# Altium PCB node.PcbDoc
Units mil, origin at the board's own origin, x right, y up, seen from the top; angles counter-clockwise.
Board outline 1500 x 1050 mil, 2 copper layers (Top Layer, Bottom Layer); 20 components, 25 nets, 93 pads, 0 vias.
Unrouted connection lines stored in the file: 51.
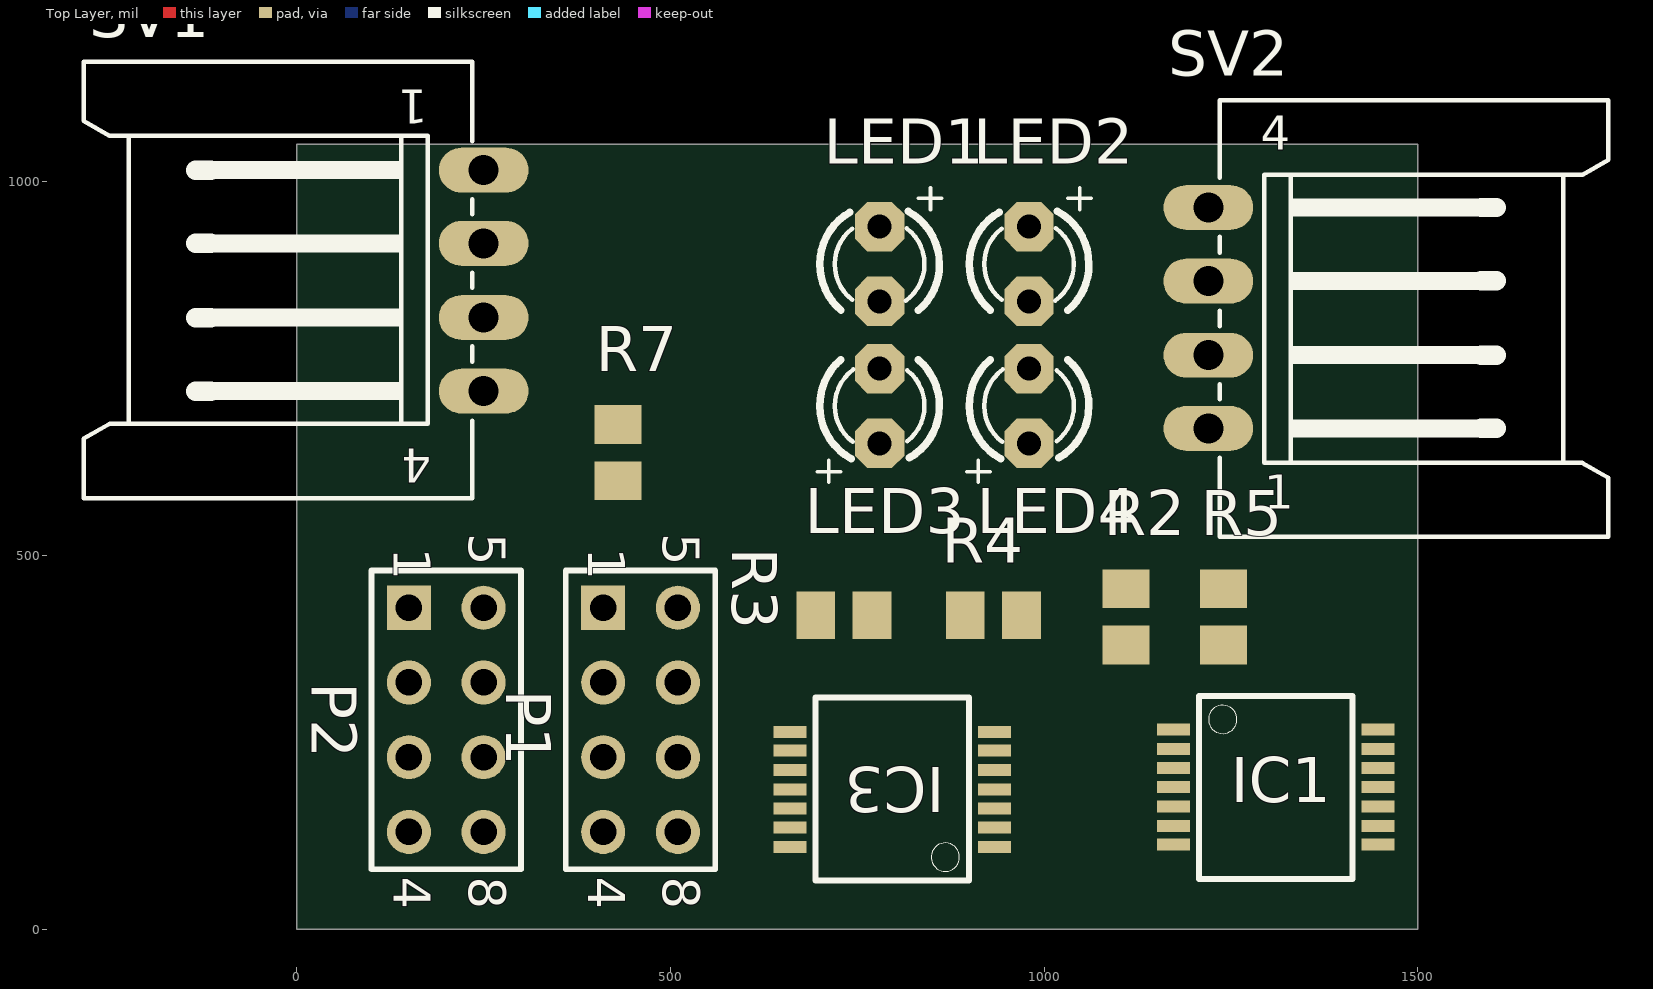
[diagram p0: Top Layer view]
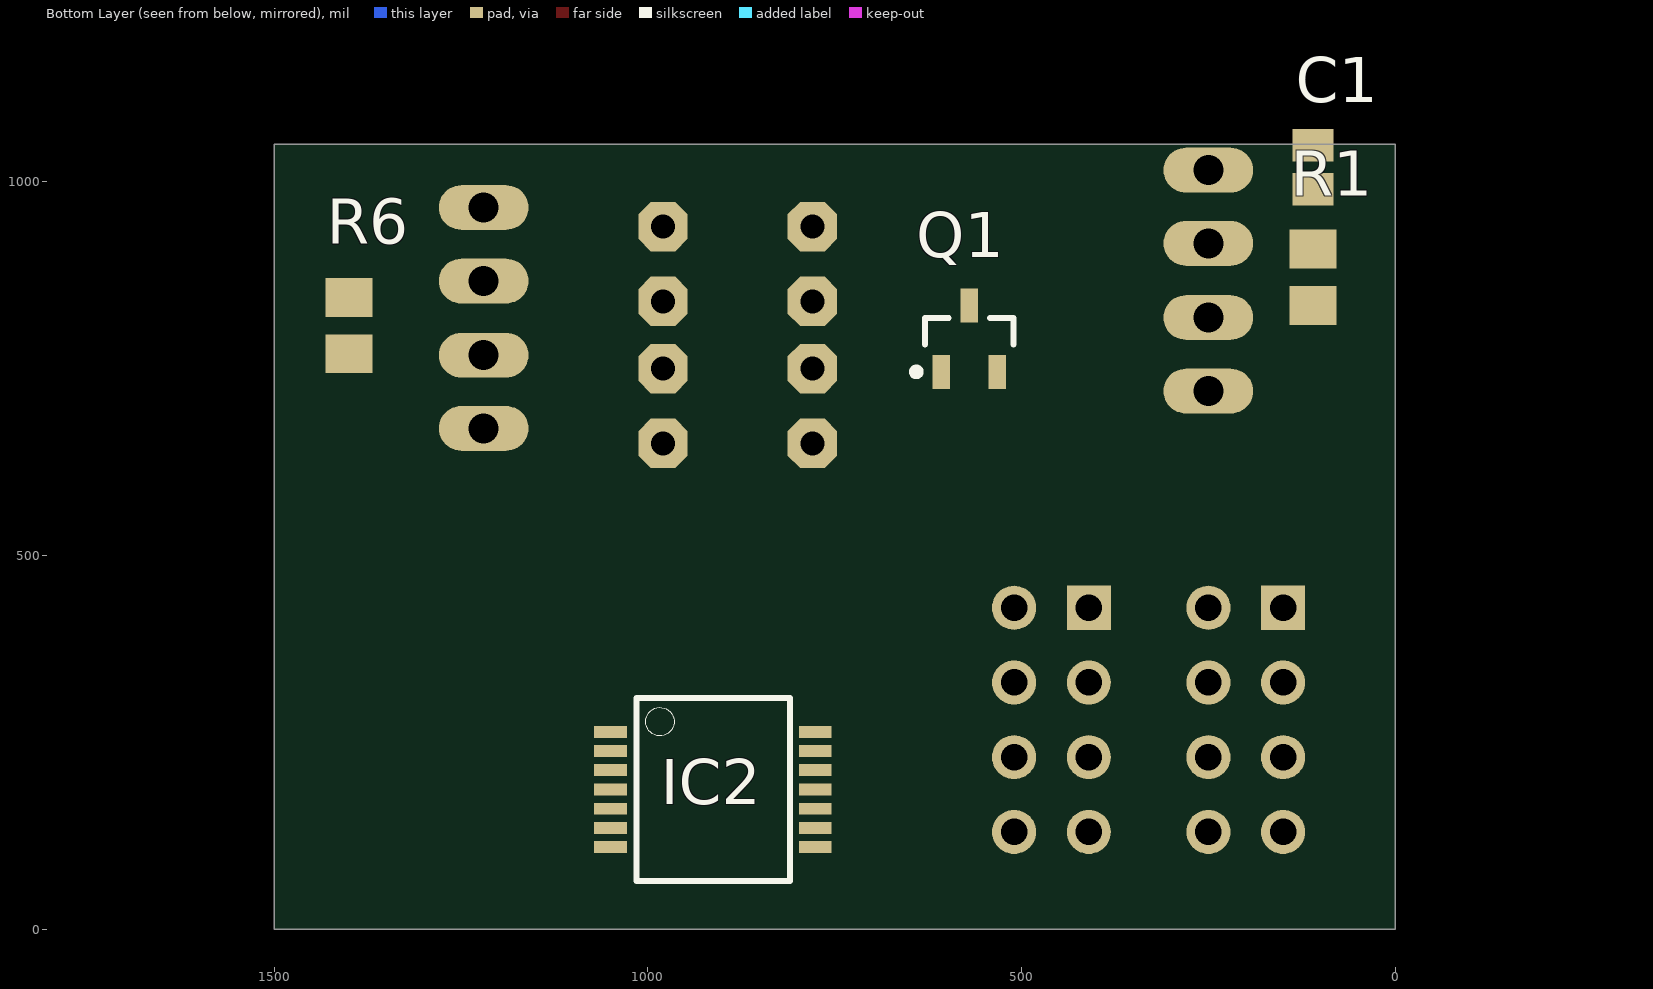
[diagram p1: Bottom Layer view, seen from below]

## Layer stack, top to bottom
Top Solder: solder mask 0.4, Solder Resist, Dk 3.5
Top Layer: signal copper 1.4
Dielectric 1: dielectric 12.6, FR-4, Dk 4.8
Bottom Layer: signal copper 1.4
Bottom Solder: solder mask 0.4, Solder Resist, Dk 3.5

## Board outline
0,0 1500,0 1500,1050 0,1050

## Design rules (kind name [scope] priority, off if disabled: settings)
Clearance [All] p1: gap=10
PolygonConnect [All] p1: connectstyle=Relief reliefconductorwidth=10 reliefentries=4 polygonreliefangle="90 Angle" airgapwidth=10
RoutingVias [All] p1: holewidth=28 width=50 viastyle="Through Hole" minholewidth=28 minwidth=50 maxholewidth=28 maxwidth=50
SolderMaskExpansion [All] p1: expansion=4
UnpouredPolygon [All] p1: allowunpoured=FALSE
Width power [InNetClass('power')] p1: maxlimit=50 minlimit=27 preferedwidth=32
Width signal [InNetClass('signal')] p2: maxlimit=25 minlimit=10 preferedwidth=18
29 further rules are at their usual default settings.

## Classes and differential pairs
net class signal: G1A G1B G2A G2B G3A G3B G4A G4B GA GB GND NetIC1_2 NetIC1_4 NetIC1_5 NetIC1_6 NetIC1_8 NetIC1_9 NetIC1_11 NetIC3_3 NetIC3_6 TO_LED
net class power: GA GB GND NetLED1_A NetLED1_K NetQ1_2 TO_LED VCC

## Components (designator, comment, footprint, x,y, rotation, side; value= is the part's Value field where it differs from the comment)
C1 "Cap Pol3" C0805 110,1019.53 r270 bottom
IC1 "Inverter" ssop14 1310,190 r270 top
IC2 "NAND" SSOP14 913.19,187 r270 bottom
IC3 "OR" ssop14 797,186.77 r90 top
LED1 "3mmLED" LED3MM 780,890 r270 top
LED2 "3mmLED" LED3MM 980,890 r270 top
LED3 "3mmLED" LED3MM 780,700 r90 top
LED4 "3mmLED" LED3MM 980,700 r90 top
P1 "Header 4X2A" HDR2X4_CEN 410,430 r270 top
P2 "Header 4X2A" HDR2X4_CEN 150,430 r270 top
Q1 "PNP" SOT-23B_N 570,790 r90 bottom
R1 "4.7k" M0805 110,872.6 r270 bottom
R2 "4.7k" M0805 1110,418 r270 top
R3 "4.7k" M0805 732.6,420 r180 top
R4 "4.7k" M0805 932,420 r0 top
R5 "4.7k" M0805 1240,418 r270 top
R6 "4.7k" M0805 1400,808 r270 bottom
R7 "4.7k" M0805 430,638 r270 top
SV1 "IN_HD" L04P 3.94,867.64 r90 top
SV2 "OUT_HD" L04P 1466.06,818 r270 top

## Footprints (in the part's own frame and the unit in brackets; to place one, negate y for a bottom-side part, rotate by r counter-clockwise, add the part's x,y. Pads: shape width x height; smd on the part's side, far side on the other; paste and mask are expansions set on the pad)
C0805 [mm] "Chip Capacitor, Body 2.0x1.3mm, IPC High Density"
  rect 1.1x1.4 smd: 1(-0.75,0) 2(0.75,0)
  body extent -1.1,-0.72 1.1,0.72, height 1.4
HDR2X4_CEN [mm] "Connector; Header; 4x2 Position"
  rect 1.5x1.5 hole 0.9: 1(0,0)
  round 1.5 hole 0.9: 2(2.54,0) 3(5.08,0) 4(7.62,0) 5(0,2.54) 6(2.54,2.54) 7(5.08,2.54) 8(7.62,2.54)
  silkscreen extent -1.27,-1.27 8.89,3.81
L04P [mil]
  oval 60x120 hole 40: 1(148,-246.06) 2(50,-246.06) 3(-49.21,-246.06) 4(-147.64,-246.06)
  silkscreen extent -291,-231 293,289
LED3MM [mil]
  oct 66x66 hole 32: A(-50,0) K(50,0)
  silkscreen extent -102,-80 62,83
M0805 [mil]
  rect 52x63 smd: 1(-37.4,0) 2(38,0)
SOT-23B_N [mm] "SOT23, 3-Leads, Body 2.9x1.3mm, Pitch 0.95mm, Lead Span 2.4mm, IPC Medium Density"
  rect 1.15x0.6 smd: 1(-1.125,0.95) 2(-1.125,-0.95) 3(1.125,0)
  silkscreen extent -1.25,-1.5 0.7,1.93, body extent -0.7,-1.5 0.7,1.5, height 1.14
ssop14 [mil]
  rect 16x44 smd: 1(-76.77,-136.81) 2(-51.18,-136.81) 3(-25.59,-136.81) 4(0,-136.81) 5(26,-136.81) 6(52,-136.81) 7(77,-136.81) 8(77,137) 9(52,137) 10(26,137) 11(0,137) 12(-25.59,137) 13(-51.18,137) 14(-76.77,137)
  silkscreen extent -122,-102 123,103
SSOP14 [mil]
  rect 16x44 smd: 1(-76.77,-136.81) 2(-51.18,-136.81) 3(-25.59,-136.81) 4(0,-136.81) 5(26,-136.81) 6(52,-136.81) 7(77,-136.81) 8(77,137) 9(52,137) 10(26,137) 11(0,137) 12(-25.59,137) 13(-51.18,137) 14(-76.77,137)
  silkscreen extent -122,-102 123,103

## Part data
C1: "Polarized Capacitor (Surface Mount)"
IC1: library part 74*04DB
IC2: library part 74*00DB
IC3: library part 74*32DB
LED1 LED2 LED3 LED4: library part LED3MM
P1 P2: "Header, 4-Pin, Dual row"
Q1: "PNP Bipolar Transistor"
R1 R3 R4 R5 R6 R7: library part R-US_M0805, "R-M0805"
R2: library part R-US_M0805
SV1 SV2: library part L04P

## Nets (pads, with @x,y where several pads share a name; then routed paths per layer and width w, separated by ;. In a path a pad name is that pad's centre, name@x,y a point inside that pad or via, vN(x,y) a via of type N, cw(c..) or ccw(c..) an arc to the next point about the centre after c; other vN are vias at no path point)
G1A: IC1.1 P1.5
G1B: IC1.3 P2.5
G2A: P1.6 R7.2
G2B: IC3.4 P2.6
G3A: IC3.2 P1.7
G3B: P2.7 R2.2
G4A: IC2.4 P1.8
G4B: IC2.5 P2.8
GA: P1.1 P1.2 P1.3 P1.4 R1.2 SV1.3 SV2.2
GB: P2.1 P2.2 P2.3 P2.4 R6.2 SV1.4 SV2.1
GND: C1.2 R1.1 R2.1 R4.2 R5.2 R6.1 R7.1 SV1.2 SV2.3
NetIC1_2: IC1.2 IC2.1
NetIC1_4: IC1.4 IC2.2
NetIC1_5: IC1.5 IC2.3
NetIC1_6: IC1.6 IC3.1
NetIC1_8: IC1.8 IC3.5
NetIC1_9: IC1.9 IC2.6
NetIC1_11: IC1.11 IC3.8
NetIC3_3: IC3.3 IC3.9
NetIC3_6: IC3.6 IC3.10
NetLED1_A: LED1.A LED2.A LED3.A LED4.A Q1.1
NetLED1_K: LED1.K LED2.K LED3.K LED4.K R5.1
NetQ1_2: Q1.2 R3.2
TO_LED: IC1.10 R3.1 R4.1
VCC: C1.1 Q1.3 SV1.1 SV2.4
pads on no net: IC1.7 IC1.12 IC1.13 IC1.14 IC2.7 IC2.8 IC2.9 IC2.10 IC2.11 IC2.12 IC2.13 IC2.14 IC3.7 IC3.11 IC3.12 IC3.13 IC3.14

## Text inside footprints (layer, text, board x,y; h text height)
P1: Top Overlay "5" at 490,530 h50 r270; Top Overlay "1" at 390,510 h50 r270; Top Overlay "4" at 390,70 h50 r270; Top Overlay "8" at 490,70 h50 r270
P2: Top Overlay "5" at 230,530 h50 r270; Top Overlay "1" at 130,510 h50 r270; Top Overlay "4" at 130,70 h50 r270; Top Overlay "8" at 230,70 h50 r270
SV1: Top Overlay "4" at 180,658.28 h77.5 r180; Top Overlay "1" at 175,1138.64 h77.5 r180
SV2: Top Overlay "4" at 1290,1027.36 h77.5; Top Overlay "1" at 1295,547 h77.5